# Allegro board CAD_2.brd
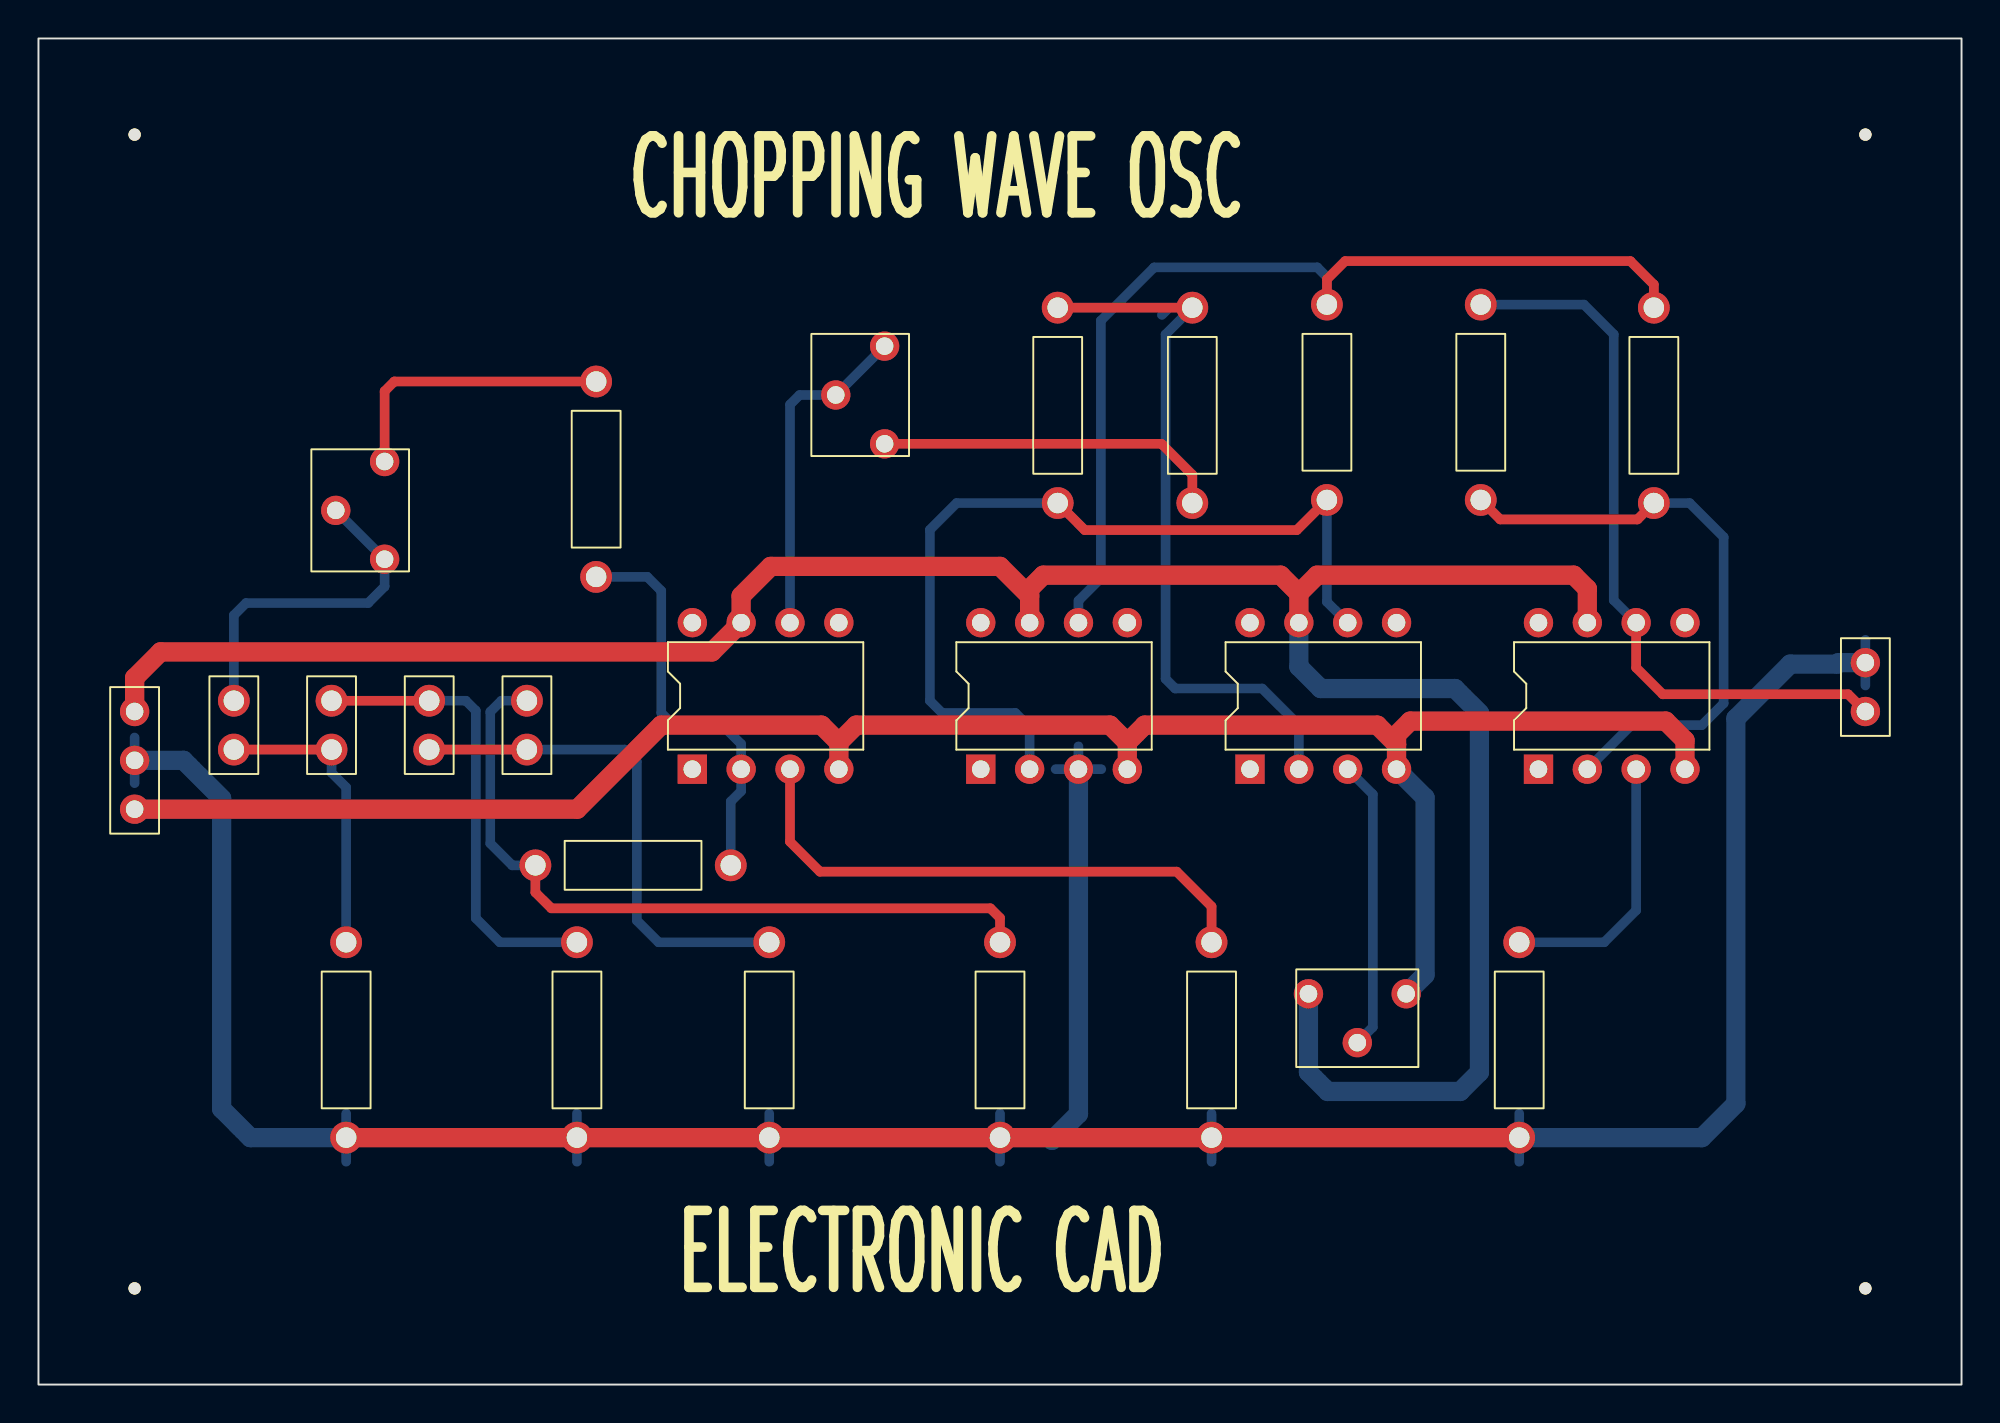
[diagram p0: board, top side]
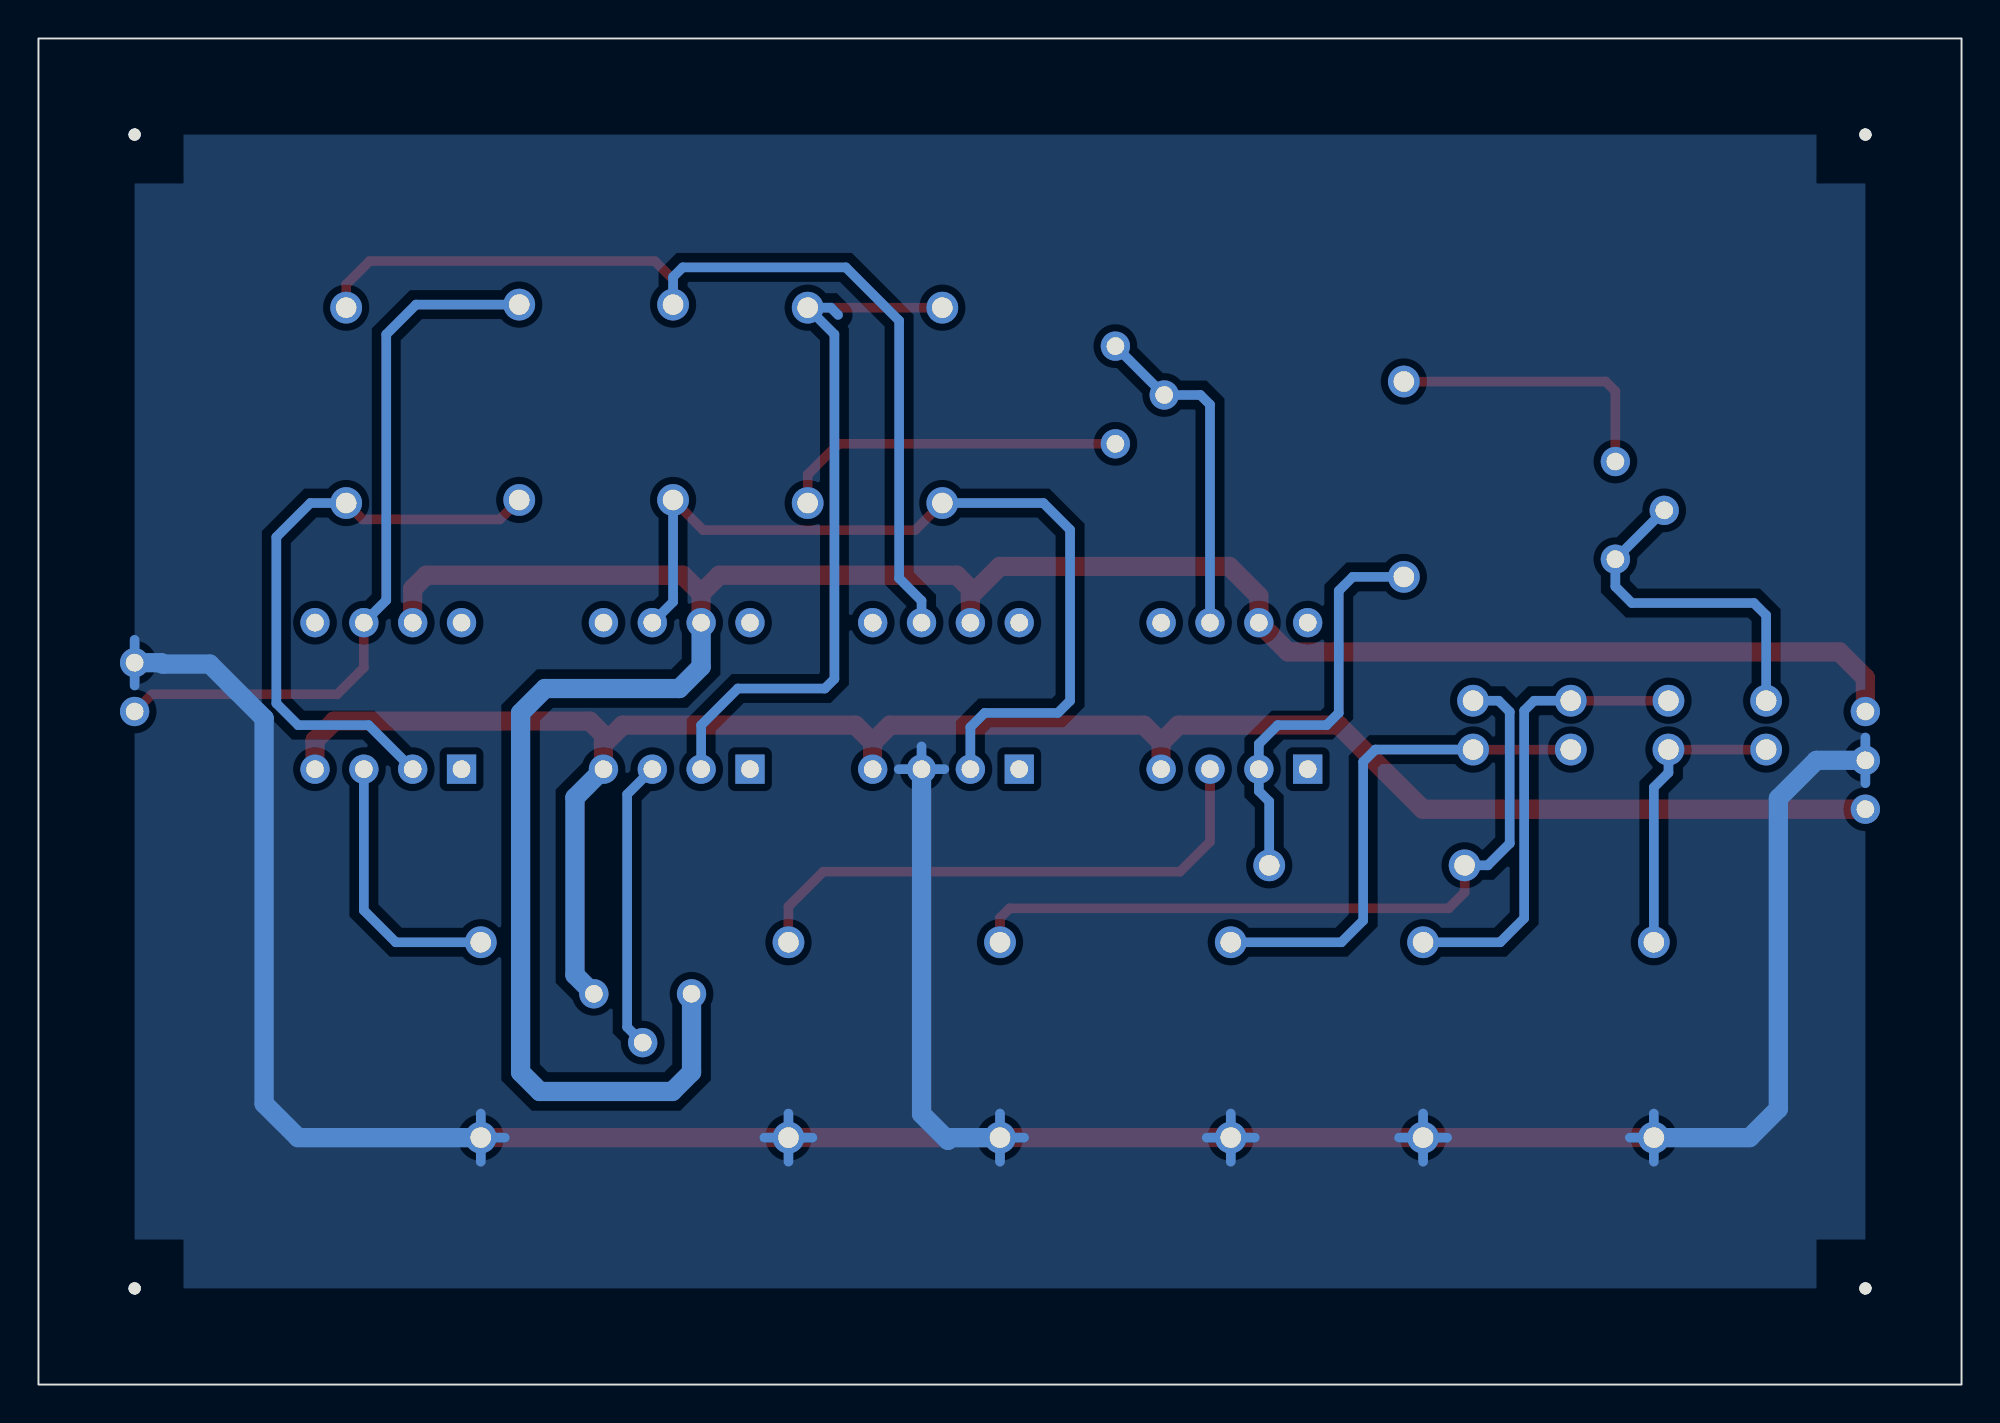
[diagram p1: board, bottom side, seen from below]

Outline 100 x 70 mm; copper layers: TOP, BOTTOM. Coordinates in mm from the lower left corner of the outline.
Outline path: rectangle 0,0 100,70

## Design rules (mm)
constraint set DEFAULT: min track width 0.5

## Placement (name value [footprint] x y rotation side)
C1  0.001uF  [CAPCK05]  10.16 33.02 0 top
C2  0.001uF  [CAPCK05]  15.24 33.02 0 top
C3  0.001uF  [CAPCK05]  20.32 35.56 180 top
C4  0.001uF  [CAPCK05]  25.4 33.02 0 top
J1  CON3  [JUMPER3]  5 35 270 top
J2  CON2  [JUMPER2]  95 35 90 top
NOREF  -  [unnamed]  95 5 0 top
NOREF#2  -  [unnamed]  5 5 0 top
NOREF#3  -  [unnamed]  5 65 0 top
NOREF#4  -  [unnamed]  95 65 0 top
R1  10K  [RES400]  53 56 180 top
R2  15K  [RES400]  29 42 0 top
R3  R  [RES400]  36 27 90 top
R4  20K  [RES400]  60 56 180 top
R5  4.7K  [RES400]  16 23 180 top
R6  4.7K  [RES400]  28 23 180 top
R7  4.7K  [RES400]  38 23 180 top
R8  4.7K  [RES400]  50 23 180 top
R9  1K  [RES400]  61 23 180 top
R10  8.2K  [RES400]  67 46 0 top
R11  10K  [RES400]  75 46 0 top
R12  2.2K  [RES400]  84 56 180 top
R13  5.1K  [RES400]  77 23 180 top
U1  LF356  [DIP8_3]  34 32 90 top
U2  LF356  [DIP8_3]  63 32 90 top
U3  LF356  [DIP8_3]  49 32 90 top
U4  LF356  [DIP8_3]  78 32 90 top
VR1  470K  [RESADJ]  18 48 0 top
VR2  100K  [RESADJ]  44 54 0 top
VR3  10K  [RESADJ]  66.04 20.32 90 top

## Library data of the parts
C1-C4 = CAP NP: Tolerance: ***; User Part Number: ***
J1 = CON3: User Part Number: ***
J2 = CON2: User Part Number: ***
R1-R13 = R: Tolerance: ***; User Part Number: ***
U1-U4 = LF356_1: Tolerance: ***; User Part Number: ***
VR1-VR3 = POT: Tolerance: ***; User Part Number: ***

## Footprints (pads in the part's own frame, mm; a bottom-side part is the same pattern mirrored in y, then rotated)
CAPCK05
  round 1.651 hole 1.067: 1(0,0) 2(0,2.54)
DIP8_3
  rect 1.524x1.524 hole 0.914: 1(0,0)
  round 1.524 hole 0.914: 2(0,-2.54) 3(0,-5.08) 4(0,-7.62) 5(7.62,-7.62) 6(7.62,-5.08) 7(7.62,-2.54) 8(7.62,0)
JUMPER2
  round 1.524 hole 0.914: 1(0,0) 2(2.54,0)
JUMPER3
  round 1.524 hole 0.914: 1(0,0) 2(2.54,0) 3(5.08,0)
RES400
  round 1.651 hole 1.067: 1(0,0) 2(0,10.16)
RESADJ
  round 1.524 hole 0.914: 1(0,0) 2(-2.54,-2.54) 3(0,-5.08)
unnamed
  round 0.635 hole 3.175 unplated: (0,0)

## Nets
+12V: J1.1 U1.7(V-) U2.7(V-) U3.7(V-) U4.7(V-) VR3.1
-12V: J1.3 U1.4 U2.4 U3.4 U4.4 VR3.3
GND: J1.2 J2.2 R5.2 R6.2 R7.2 R8.2 R9.2 R13.2 U3.3
OUT: J2.1 R11.2 U4.6
SIG: R1.2 R10.1 U2.6 U3.2
N00243: C1.1 C2.1 R5.1
N00250: C2.2 C3.1 R6.1
N00259: C3.2 C4.1 R7.1
N00267: C4.2 R3.2 R8.1
N00378: C1.2 VR1.2(WIPER) VR1.3
N00599: R2.1 R3.1 U1.2
N00839: U1.6 VR2.1 VR2.2(WIPER)
N01086: R9.1 U1.3
N001251: R2.2 VR1.1
N01402: R1.1 R4.1 U2.2
N01474: U2.3 VR3.2(WIPER)
N01925: R10.2 R12.1 U3.6
N02376: R11.1 R12.2 U4.2
N02941: R13.1 U4.3
N03866: R4.2 VR2.3

Pads without a net: U1 1 5 8; U2 1 5 8; U3 1 5 8; U4 1 5 8

## Routing (per net, layer and track width the routed paths; a pad name or vN(x,y) marks a point on that pad's centre or on a via; arc(x,y) is an arc through that point)
+12V: length 132.7
  TOP w1: 51.54,41.01 51.54,41.38 52.25,42.09 64.59,42.09 65.54,41.14 ; 51.54,41.01 U3.7 ; 51.54,41.01 50.01,42.55 38.08,42.55 36.54,41.01 U1.7 35.02,38.1 6.35,38.1 5,36.75 J1.1 ; 65.54,41.14 66.49,42.09 79.83,42.09 80.54,41.38 U4.7 ; 65.54,41.14 U2.7
  BOTTOM w1: U2.7 65.54,37.33 66.67,36.2 73.66,36.2 74.93,34.92 74.93,16.24 73.93,15.24 67.04,15.24 66.04,16.24 VR3.1
-12V: length 103.8
  TOP w1: 56.62,33.39 57.52,34.29 69.62,34.29 70.62,33.29 ; 56.62,33.39 U3.4 ; 56.62,33.39 55.72,34.29 42.52,34.29 41.62,33.39 ; U2.4 70.62,33.29 ; 70.62,33.29 70.62,33.79 71.33,34.5 84.62,34.5 85.62,33.5 U4.4 ; 41.62,33.39 U1.4 ; 41.62,33.39 40.72,34.29 32.38,34.29 28.02,29.92 J1.3
  BOTTOM w1: U2.4 72.1,30.52 72.1,21.3 VR3.3
GND: length 186.8
  TOP w1: R5.2 R6.2 R7.2 R8.2 R9.2 R13.2
  BOTTOM w0.5: U3.3 54.08,33.19 ; U3.3 55.27,32 ; U3.3 52.89,32 ; 38,11.59 R7.2 ; R7.2 38,14.09 ; R7.2 36.75,12.84 ; R7.2 39.25,12.84 ; 95,38.73 J2.2 95,36.35 ; R8.2 50,14.09 ; R8.2 50,11.59 ; R8.2 48.75,12.84 ; 61,11.59 R9.2 ; R9.2 62.25,12.84 ; R9.2 59.75,12.84 ; R9.2 61,14.09 ; R6.2 29.25,12.84 ; R6.2 26.75,12.84 ; R6.2 28,14.09 ; R6.2 28,11.59 ; 75.75,12.84 R13.2 ; R13.2 77,11.59 ; R13.2 77,14.09 ; 5,31.27 J1.2 5,33.65 ; 16,11.59 R5.2 ; R5.2 17.25,12.84 ; R5.2 16,14.09
  BOTTOM w1: R5.2 11.02,12.84 9.53,14.34 9.53,30.48 7.54,32.46 J1.2 ; R13.2 86.5,12.84 88.27,14.61 88.27,34.64 91.09,37.47 93.53,37.47 93.61,37.54 J2.2 ; U3.3 54.08,14.07 52.7,12.7 52.56,12.84 R8.2
OUT: length 38.2
  TOP w0.5: J2.1 94.1,35.9 84.46,35.9 83.08,37.28 U4.6
  BOTTOM w0.5: R11.2 80.36,56.16 81.92,54.61 81.92,40.78 U4.6
SIG: length 46.1
  TOP w0.5: R10.1 65.44,44.44 54.41,44.44 R1.2
  BOTTOM w0.5: U3.2 51.54,34.19 50.8,34.92 46.99,34.92 46.35,35.56 46.35,44.45 47.74,45.84 R1.2 ; U2.6 67,40.7 R10.1
N00243: length 15.4
  TOP w0.5: C1.1 C2.1
  BOTTOM w0.5: C2.1 15.24,31.82 16,31.06 R5.1
N00250: length 24.3
  TOP w0.5: C2.2 C3.1
  BOTTOM w0.5: C3.1 22.23,35.56 22.74,35.04 22.74,24.25 23.99,23 R6.1
N00259: length 26.7
  TOP w0.5: C4.1 C3.2
  BOTTOM w0.5: C4.1 30.48,33.02 31.11,32.38 31.11,24.13 32.24,23 R7.1
N00267: length 39.2
  TOP w0.5: R3.2 25.84,25.59 26.67,24.77 49.5,24.77 50,24.26 R8.1
  BOTTOM w0.5: C4.2 24.07,35.56 23.5,34.98 23.5,28.14 24.64,27 R3.2
N00378: length 17.9
  BOTTOM w0.5: VR1.2 VR1.3 18,41.5 17.14,40.64 10.79,40.64 10.16,40.01 C1.2
N00599: length 21.4
  BOTTOM w0.5: R3.1 36,30.32 36.54,30.86 U1.2 36.54,33.31 35.56,34.29 33.02,34.29 32.38,34.92 32.38,41.27 31.66,42 R2.1
N00839: length 17.5
  BOTTOM w0.5: U1.6 39.08,50.96 39.58,51.46 VR2.2 VR2.1
N01086: length 28.9
  TOP w0.5: R9.1 61,24.86 59.19,26.67 40.64,26.67 39.08,28.23 U1.3
N001251: length 14.9
  TOP w0.5: VR1.1 18,51.66 18.5,52.16 R2.2
N01402: length 38.8
  TOP w0.5: R1.1 R4.1
  BOTTOM w0.5: 58.42,55.62 58.8,56 R4.1 58.61,54.61 58.61,36.7 59.11,36.2 63.63,36.2 65.54,34.29 U2.2
N01474: length 15.1
  BOTTOM w0.5: VR3.2 69.39,18.59 69.39,30.69 U2.3
N01925: length 51.1
  TOP w0.5: R12.1 84,57.2 82.78,58.42 67.94,58.42 67,57.48 R10.2
  BOTTOM w0.5: U3.6 54.08,40.76 55.24,41.92 55.24,55.33 58.02,58.09 66.5,58.09 67,57.59 R10.2
N02376: length 31.3
  TOP w0.5: R11.1 76.01,44.99 83.15,44.99 R12.2
  BOTTOM w0.5: R12.2 85.86,45.84 87.63,44.07 87.63,35.42 86.5,34.29 82.83,34.29 U4.2
N02941: length 14.1
  BOTTOM w0.5: R13.1 81.42,23 83.08,24.66 U4.3
N03866: length 18.1
  TOP w0.5: VR2.3 58.4,48.92 60,47.31 R4.2

## Copper pours and planes (outline as drawn; the poured copper is in the pictures)
GND on BOTTOM: 5,5 5,65 95,65 95,5 ; 1 cut-out

## Text on the board
Ref Des/Silkscreen Top: CHOPPING WAVE OSC | ELECTRONIC CAD
COMPVAL_TYPE_TOP: FIGURE | FINISHED_SIZE | 0.914 | 1.067 | 3.175 | DRILL CHART: TOP to BOTTOM | ALL UNITS ARE IN MILLIMETERS | PLATED | NON-PLATED | QTY | 46 | 34 | 4
